# EAGLE board placa_v1 (EAGLE 7.2.0)
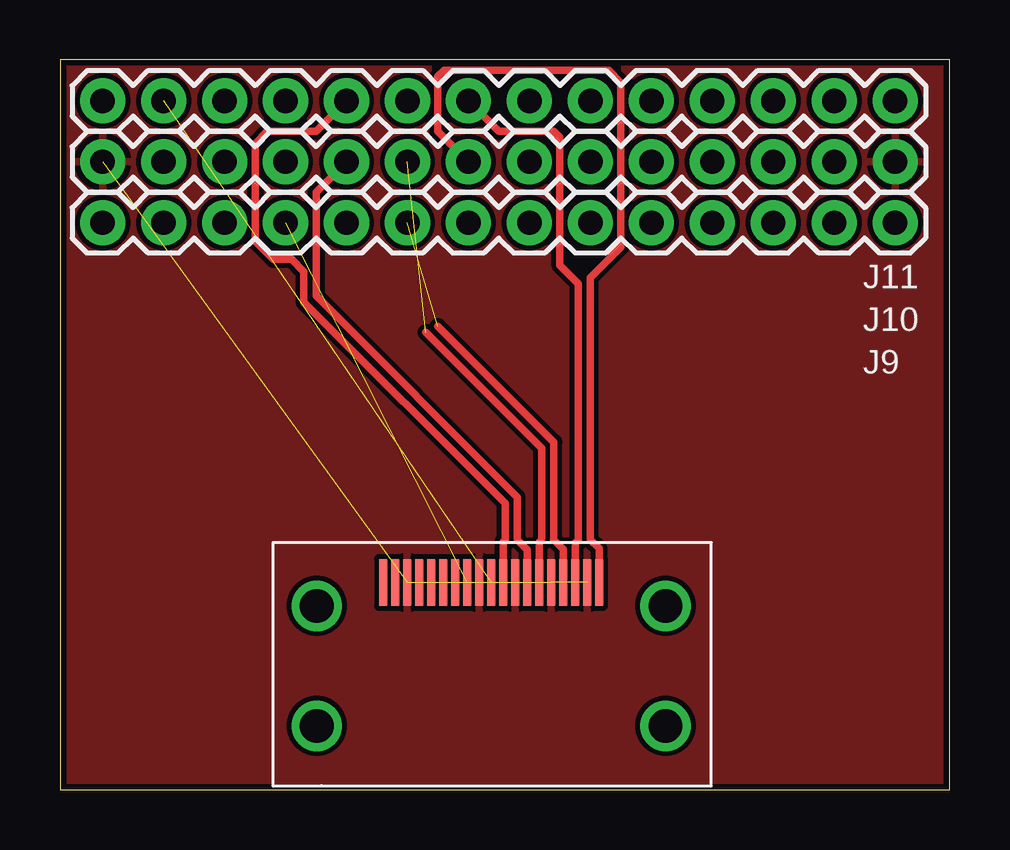
[diagram p0: board, top side]
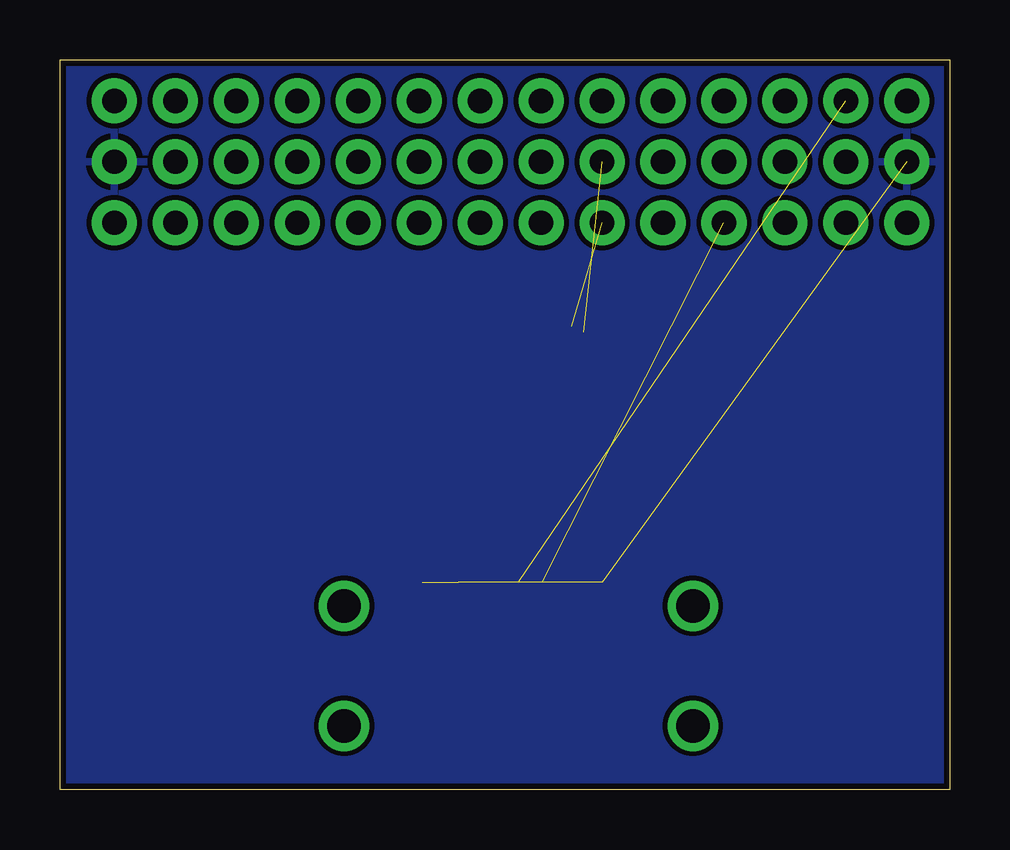
[diagram p1: board, bottom side, seen from below]

Size 37.06 x 30.4 mm. Coordinates in mm from the lower left corner, seen from the top.
Outline: 0,0 37.06,0 37.06,30.4 0,30.4 0,0
Copper layers (1*16): Top 0.035mm / dielectric 1.5mm / Bottom 0.035mm
Design rules "dirt_cheap_dirty_boards.v1": minimum track width 5mil, minimum drill 12mil, track to track 5mil, track to pad 5mil, pad to pad 5mil, via to via 5mil, smd to smd 0mil, copper to edge 10mil, drill to drill 10mil, minimum pad ring 10mil, minimum via ring 6mil, stop-mask expansion 2mil, vias tented up to drill 25mil, thermal gap 10mil
Net classes: 0 default: width 0.203 mm, clearance 0.203 mm; 1 power: width 0.406 mm, clearance 0.203 mm to class 0, clearance 0.203 mm

## Footprints (pad centres in the part's own frame; a part is rotated, then mirrored left to right if it is on the bottom)
1X14 = drill 1.016 pad 1.88: 1 0,0; 2 2.54,0; 3 5.08,0; 4 7.62,0; 5 10.16,0; 6 12.7,0; 7 15.24,0; 8 17.78,0; 9 20.32,0; 10 22.86,0; 11 25.4,0; 12 27.94,0; 13 30.48,0; 14 33.02,0
HDMI = smd 0.33 x 1.95: P$1 0,0; P$2 0.5,0; P$3 1,0; P$4 1.5,0; P$5 2,0; P$6 2.5,0; P$7 3,0; P$8 3.5,0; P$9 4,0; P$10 4.5,0; P$11 5,0; P$12 5.5,0; P$13 6,0; P$14 6.5,0; P$15 7,0; P$16 7.5,0; P$17 8,0; P$18 8.5,0; P$19 9,0 | drill 1.4: P$20 -2.765,-0.975; P$21 -2.765,-5.975; P$22 11.765,-5.975; P$23 11.765,-0.975

## Placement (x,y rotation side)
J9  M14  [1X14]  1.78,23.62 0 top
J10  M14  [1X14]  1.78,26.16 0 top
J11  M14  [1X14]  1.78,28.7 0 top
U$1  HDMI  [HDMI]  13.46,8.64 0 top

## Library data of the parts
J9-J11 = SparkFun
U$1 = 00_cody

## Nets
CLK_N: J9.4 U$1.P$8
CLK_P: J11.2 U$1.P$10
D0_N: J11.5 U$1.P$11
D0_P: J10.5 U$1.P$13
D1_N: J10.6 U$1.P$14
D1_P: J9.6 U$1.P$16
D2_N: J11.7 U$1.P$17
D2_P: J10.7 U$1.P$19
GND [power]: J10.1 J10.14 U$1.P$3 U$1.P$9 U$1.P$12 U$1.P$15 U$1.P$18

## Tracks (layer width: path | path; a pad name or v marks a point on that pad's centre or on a via)
CLK_N  (1 unrouted)
CLK_P  (1 unrouted)
D0_N
  Top 0.305: U$1.P$11 18.46,10.33 18.54,10.41 18.54,11.94 10.16,20.32 10.16,21.59 9.65,22.1 8.89,22.1 8.13,22.86 8.13,26.92 8.64,27.43 10.67,27.43 J11.5
D0_P
  Top 0.305: U$1.P$13 19.46,10 19.05,10.41 19.05,12.19 10.67,20.57 10.67,24.89 J10.5
D1_N  (1 unrouted)
  Top 0.305: U$1.P$14 19.96,10.31 20.07,10.41 20.07,14.22 15.24,19.05
D1_P  (1 unrouted)
  Top 0.305: U$1.P$16 20.96,10.03 20.57,10.41 20.57,14.48 15.75,19.3
D2_N
  Top 0.305: U$1.P$17 21.46,10.29 21.59,10.41 21.59,21.08 20.83,21.84 20.83,27.18 20.57,27.43 18.29,27.43 J11.7
D2_P
  Top 0.305: U$1.P$19 22.46,10.05 22.1,10.41 22.1,21.34 23.37,22.61 23.37,29.46 22.86,29.97 16,29.97 15.75,29.72 15.75,27.43 J10.7
GND  (5 unrouted)
  pour Bottom: 0,30.48 37.08,30.48 37.08,0 0,0
  pour Top: 0,30.48 37.08,30.48 37.08,0 0,0